# EAGLE board 8bitbig-bacon_home-panel (EAGLE 9.2.2)
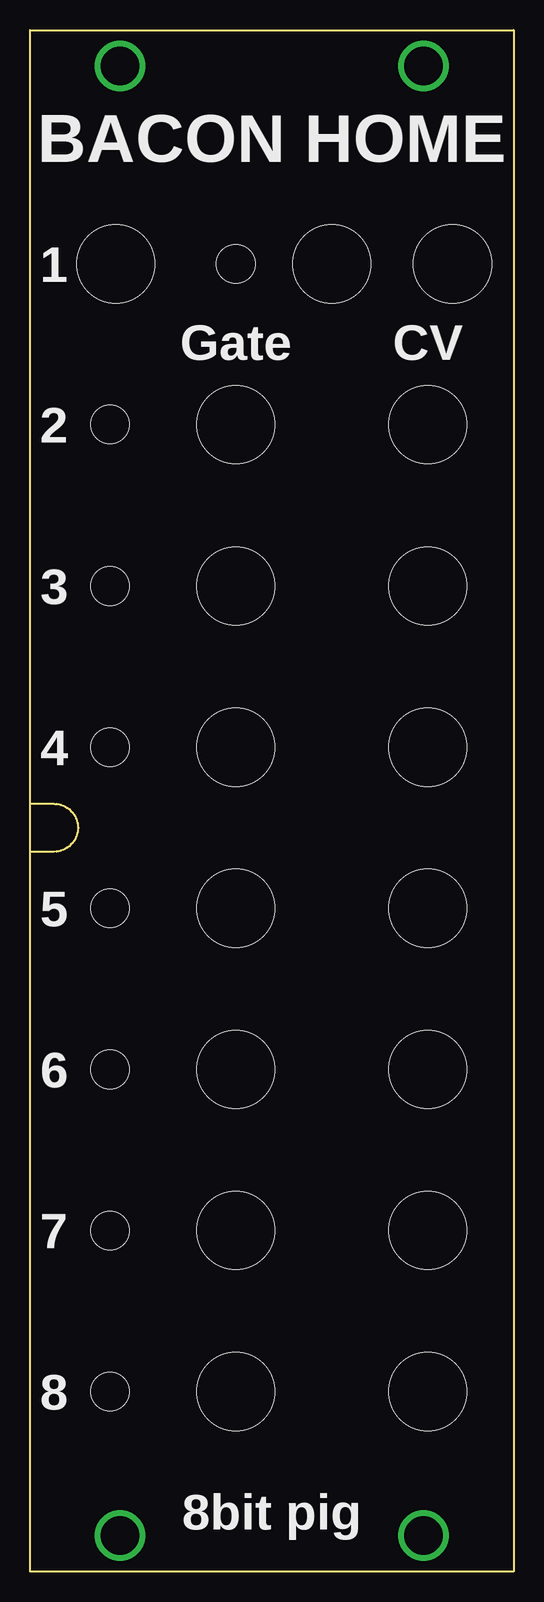
[diagram p0: board, top side]
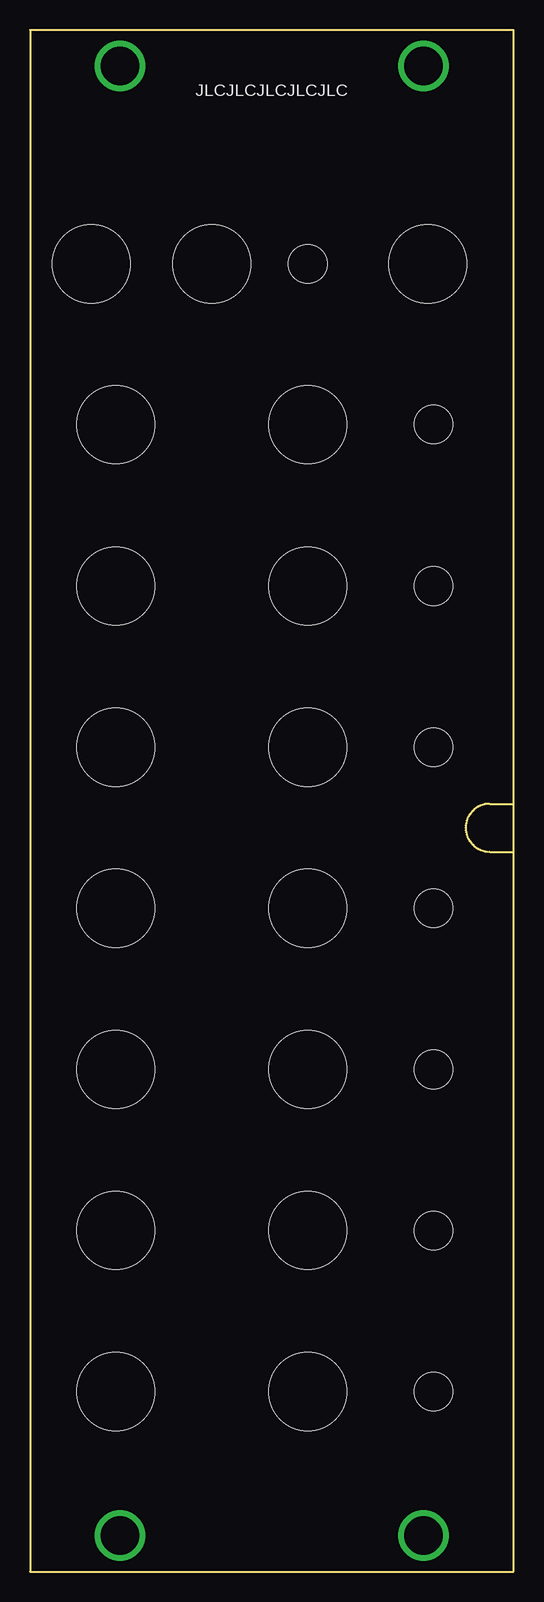
[diagram p1: board, bottom side, seen from below]

Size 40.3 x 128.5 mm. Coordinates in mm from the lower left corner, seen from the top.
Outline: 0,0 0,128.5 40.3,128.5 40.3,0 0,0
Copper layers (1*16): Top 0.035mm / dielectric 1.5mm / Bottom 0.035mm
Design rules "default": minimum track width 6mil, minimum drill 0.35mm, track to track 6mil, track to pad 6mil, pad to pad 6mil, via to via 6mil, smd to smd 6mil, copper to edge 40mil, drill to drill 6mil, minimum pad ring 10mil, minimum via ring 8mil, stop-mask expansion 4mil, vias tented up to drill 0mil, thermal gap 10mil
Holes 3.2 mm at 6.67,82.14 6.67,95.61 6.67,15 6.67,68.71 6.67,41.86 6.67,55.29 6.67,28.43 17.15,109
Holes 6.5 mm at 7.15,109 17.15,95.61 33.15,95.61 25.15,109 35.2,109 17.15,82.14 33.15,82.14 17.15,68.71 33.15,68.71 17.15,55.29 33.15,55.29 17.15,41.86 33.15,41.86 17.15,28.43 33.15,28.43 17.15,15 33.15,15

## Placement (x,y rotation side)
E$1  [PANEL_CABLE_CUTOUT]  0,62 0 top

## Library data of the parts
E$1 = SchnitzelsComponents

## Tracks (layer width: path | path; a pad name or v marks a point on that pad's centre or on a via)
S$1  (via drill 3.2)
  other vias: 7.5,125.5
S$2  (via drill 3.2)
  other vias: 32.8,125.5
S$3  (via drill 3.2)
  other vias: 32.8,3
S$4  (via drill 3.2)
  other vias: 7.5,3
S$5
  Bottom 0.152: 16.5,40 17,40
S$6
  Top 0.152: 16.5,40.5 17,40.5

## Text on the board
tPlace: BACON HOME | 1 | Gate | CV | 2 | 3 | 4 | 5 | 6 | 7 | 8 | 8bit pig
bPlace: JLCJLCJLCJLCJLC